# Altium PCB nrf.PcbDoc
Units mm, origin at the board's own origin, x right, y up, seen from the top; angles counter-clockwise.
Board outline 42.01 x 33.93 mm, 2 copper layers (Top Layer, Bottom Layer); 51 components, 41 nets, 214 pads, 62 vias.
Unrouted connection lines stored in the file: 1.
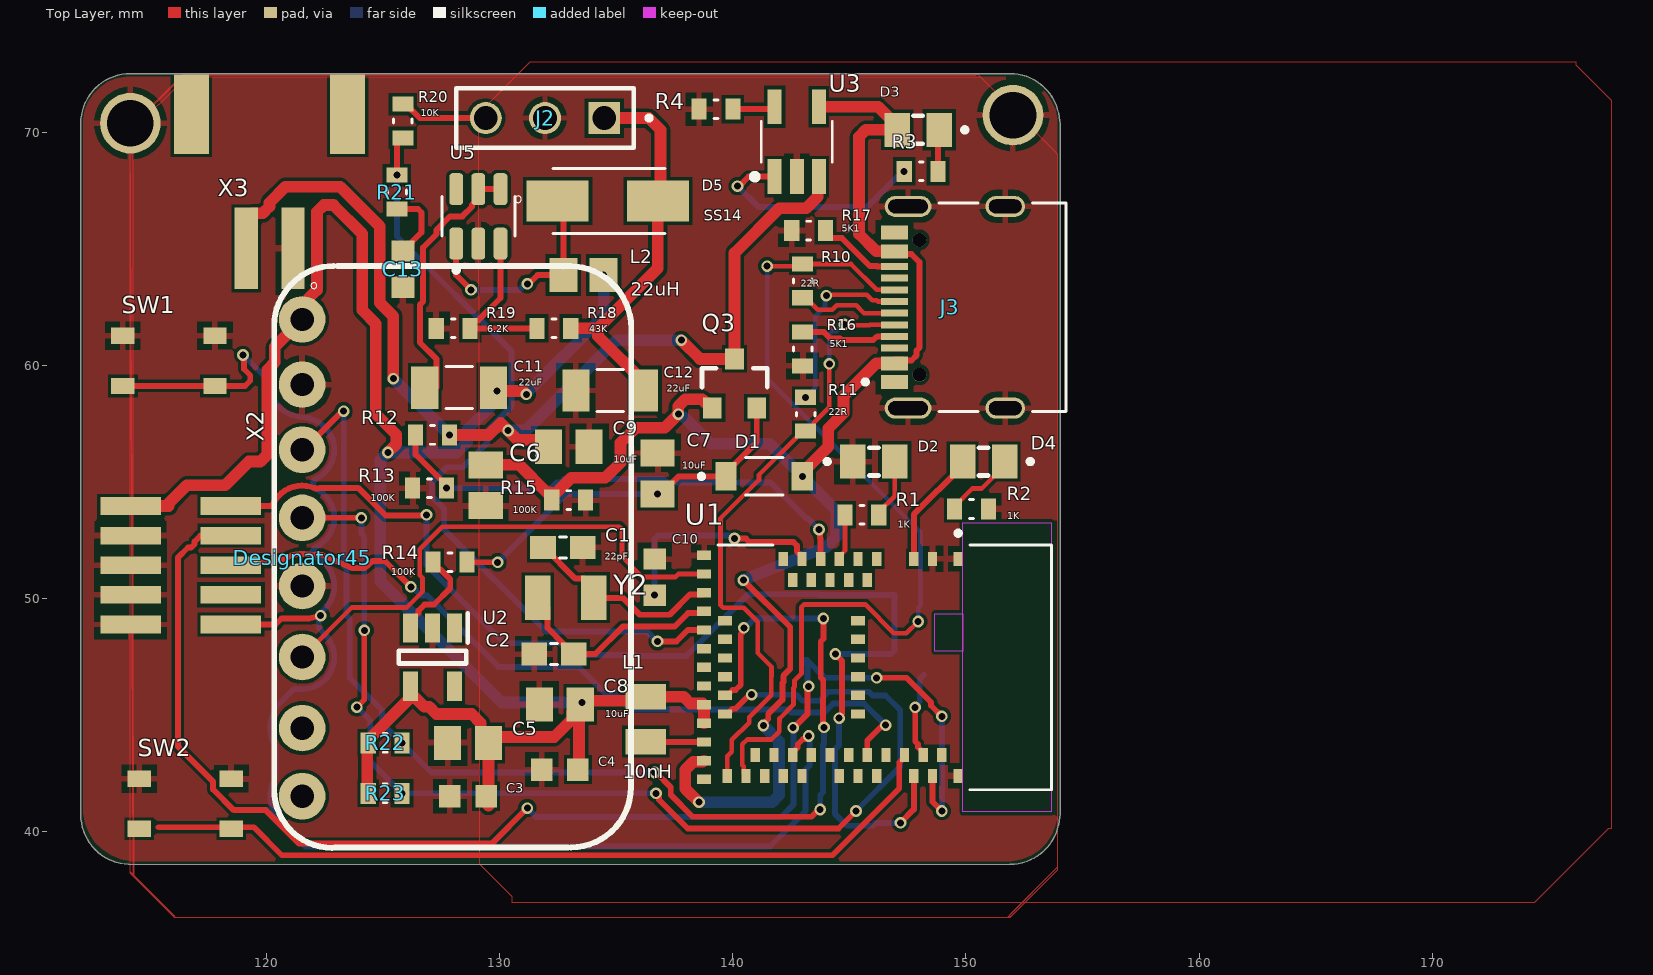
[diagram p0: Top Layer view]
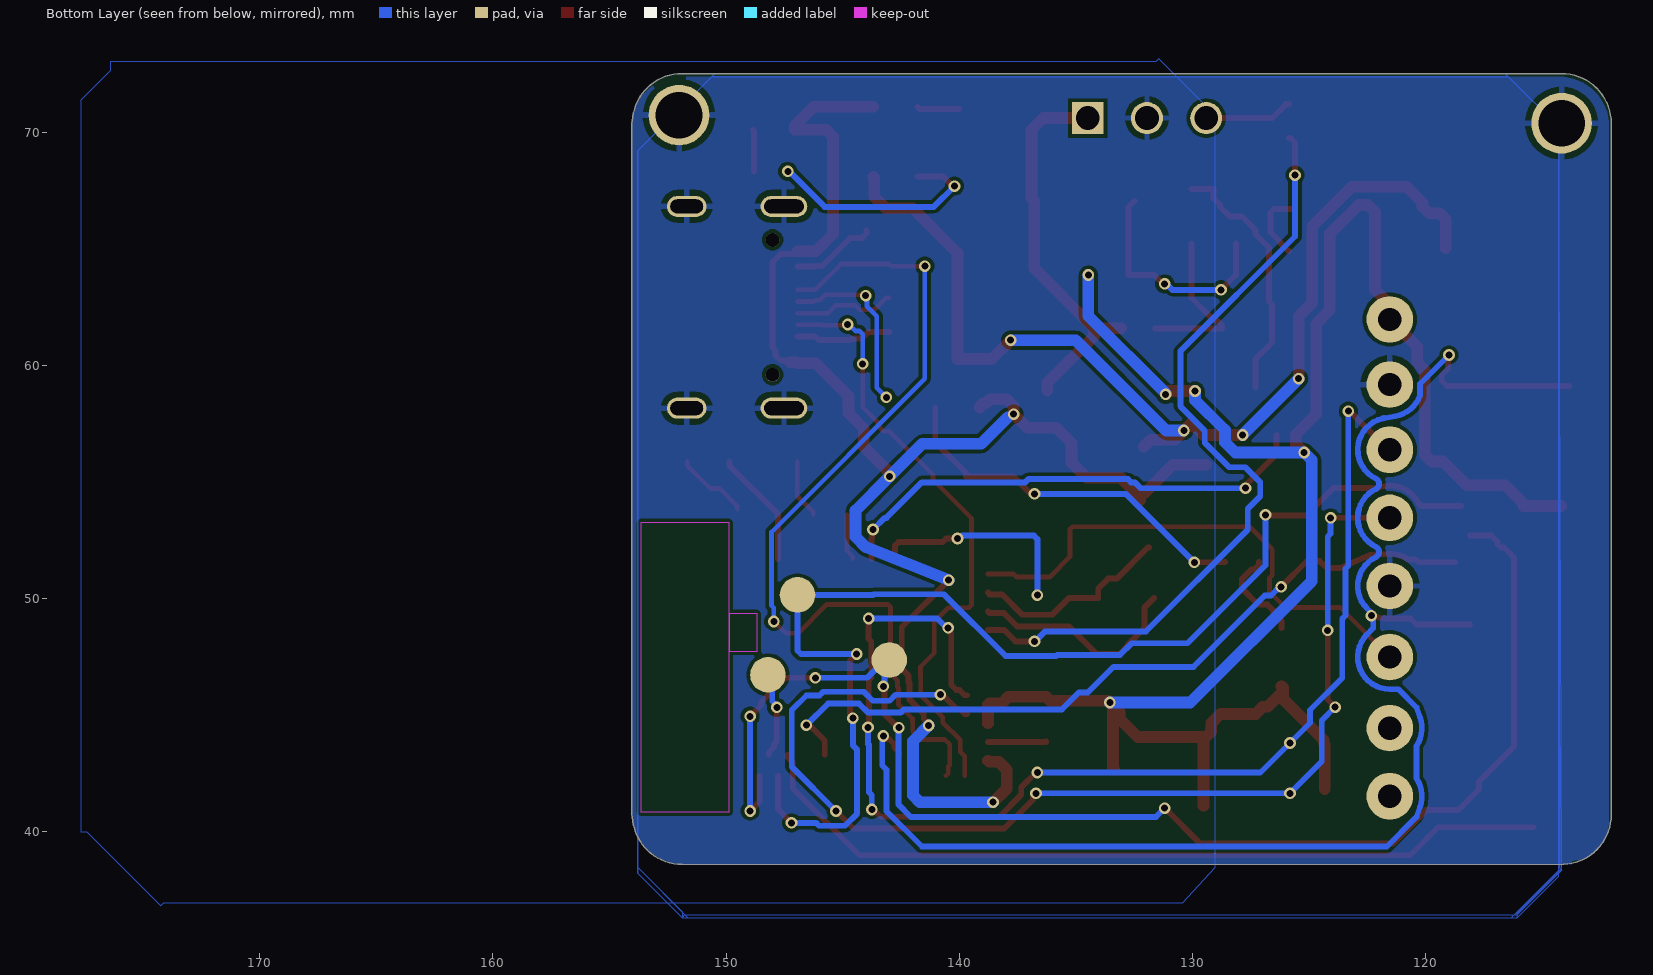
[diagram p1: Bottom Layer view, seen from below]
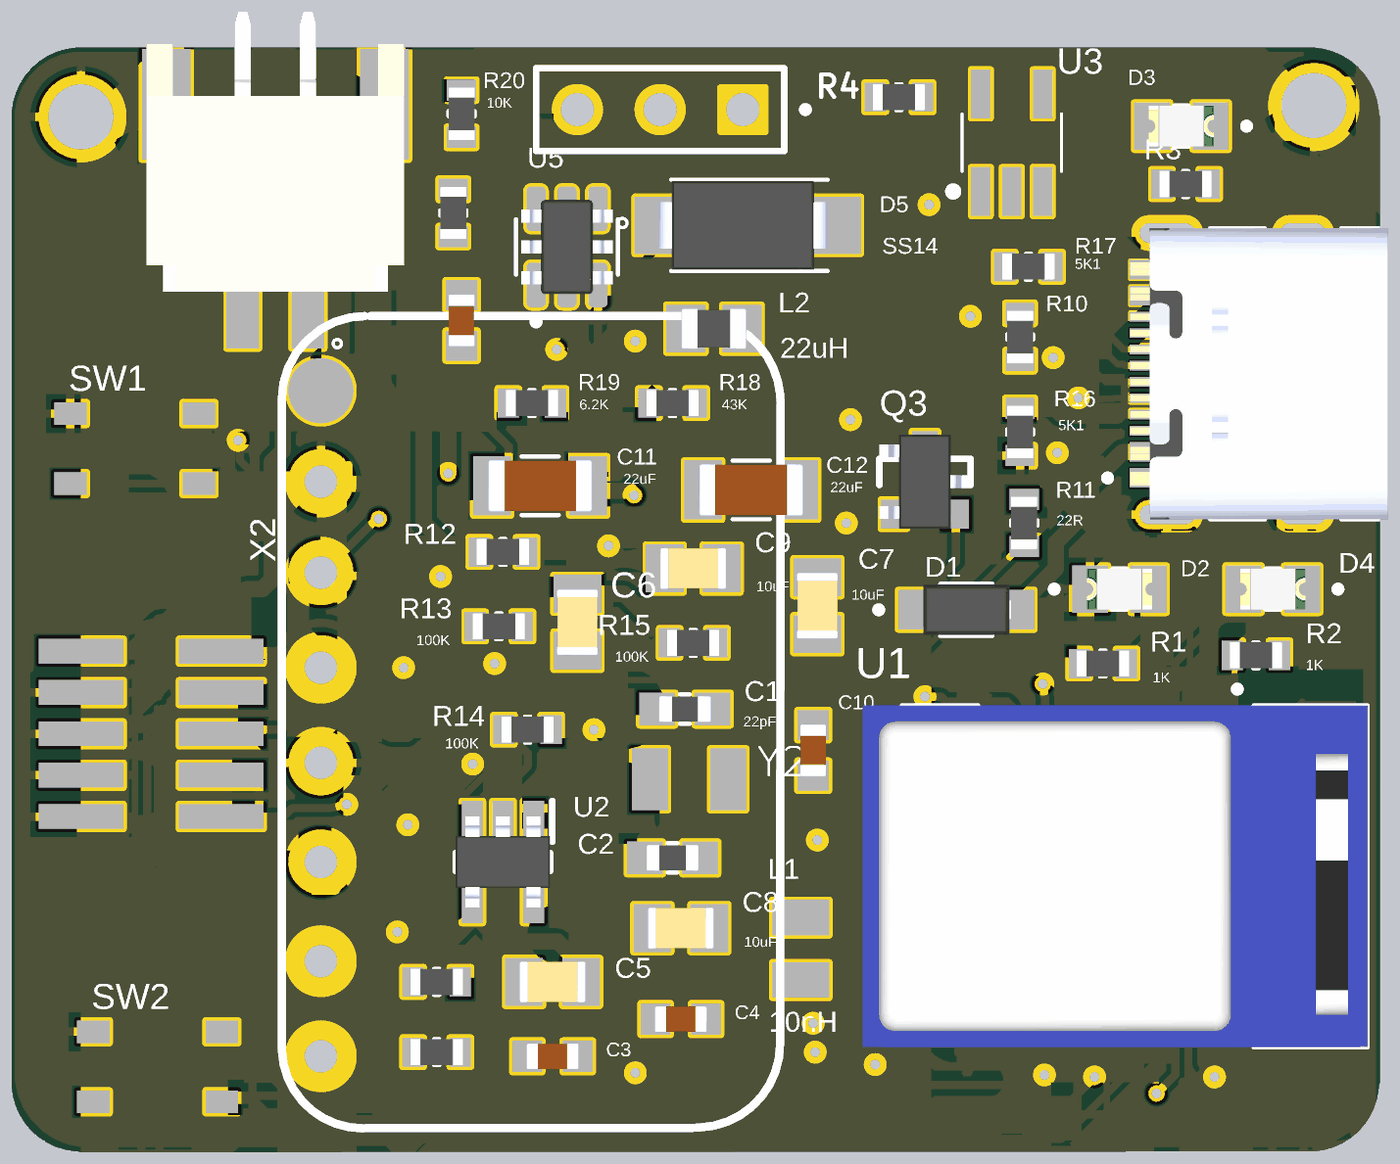
[diagram p2: 3D render of the assembled board from above, using the file's embedded part models]

## Layer stack, top to bottom
Top Solder: solder mask 0.0102, Solder Resist, Dk 3.5
Top Layer: signal copper 0.0356
Dielectric 1: dielectric 0.32, FR-4, Dk 4.8
Bottom Layer: signal copper 0.0356
Bottom Solder: solder mask 0.0102, Solder Resist, Dk 3.5

## Board outline
112.046,40.735 ccw(c114.173,40.735) 114.097,38.609 114.173,38.584 151.891,38.608 151.892,38.608 ccw(c151.892,40.735) 154.018,40.649 154.051,40.735 154.051,70.39 154.018,70.476 ccw(c151.892,70.39) 151.892,72.517 114.174,72.517 114.173,72.517 ccw(c114.173,70.39) 112.046,70.39

## Design rules (kind name [scope] priority, off if disabled: settings)
Clearance Clearance_1 [All] p1: gap=0.15 ignorepadtopadclearanceinfootprint=FALSE
PolygonConnect [All] p1: connectstyle=Relief reliefconductorwidth=0.254 reliefentries=4 polygonreliefangle="90 Angle" airgapwidth=0.254
RoutingVias [All] p1: holewidth=0.711 width=1.27 viastyle="Through Hole" minholewidth=0.711 minwidth=1.27 maxholewidth=0.711 maxwidth=1.27
SolderMaskExpansion [All] p1: expansion=0.102 istentingtop=FALSE
Width [All] p1: maxlimit=0.5 minlimit=0.2 preferedwidth=0.254 minimp=50.000000 maximp=50.000000 favimp=50.000000
30 further rules are at their usual default settings.

## Components (designator, comment, footprint, x,y, rotation, side; value= is the part's Value field where it differs from the comment)
C1 "22pF" CAPC1608X90 132.715,52.197 r0 top
C2 "22pF" CAPC1608X90 132.334,47.625 r180 top
C3 "0.1uF" CAPC1608X90N#1 128.651,41.529 r180 top
C4 "0.1uF" CAPC1608X90N#1 132.588,42.672 r180 top
C5 "10uF" CAPC2012X88N 128.651,43.815 r0 top
C6 "10uF" CAPC2012X88N 129.413,54.864 r90 top
C7 "10uF" CAPC2012X88N 136.779,55.372 r270 top
C8 "10uF" CAPC2012X88N 132.588,45.466 r0 top
C9 "10uF" CAPC2012X88N 132.969,56.515 r180 top
C10 "0.1uF" CAPC1608X90N#1 136.652,50.927 r90 top
C11 "22uF" CAPC3216X229N 128.27,59.055 r0 top
C12 "22uF" CAPC3216X229N 134.747,58.928 r0 top
C13 "100nF" CAPC1608X90N#2 125.857,64.135 r90 top
D1 "MBR0540" DIO_MBR0540-TP 141.351,55.245 r0 top
D2 "RED" LEDC2012X70N 146.05,55.88 r0 top
D3 "ORANGE" LEDC2012X70N 147.955,70.104 r180 top
D4 "BLUE" LEDC2012X70N 150.76,55.88 r180 top
D5 "SS14" SMA 134.493,67.056 r0 top
Designator45 "Comment" PCBComponent_1 132.461,50.292 r270 top
J2 "MTSW-103-13-G-S-570" SAMTEC_MTSW-103-13-G-S-570 131.953,70.612 r0 top
J3 "TYPE-C-31-M-12" HRO_TYPE-C-31-M-12 151.689,62.496 r90 top (schematic designator J?)
L1 "10nH" INDC2015X152N 136.271,44.831 r270 top
L2 "22uH" INDC2012X145N 133.604,63.881 r180 top
Q3 "AO3401" SOT23-3 140.081,59.182 r0 top
R1 "1K" RES_ERJU03J5R6V 145.542,53.594 r0 top
R2 "1K" RES_ERJU03J5R6V 150.241,53.848 r0 top
R3 "1K" RES_ERJU03J5R6V 148.082,68.326 r180 top
R4 "4K7" RES_ERJU03J5R6V 139.282,70.993 r180 top
R10 "22R" RES_ERJU03J5R6V 143.002,63.627 r270 top
R11 "22R" RES_ERJU03J5R6V 143.129,57.912 r90 top
R12 "100K" RES_ERJU03J5R6V 127.127,57.023 r180 top
R13 "100K" RES_ERJU03J5R6V 127,54.737 r0 top
R14 "100K" RES_ERJU03J5R6V 127.881,51.566 r0 top
R15 "100K" RES_ERJU03J5R6V 132.969,54.229 r0 top
R16 "5K1" RES_ERJU03J5R6V 143.002,60.706 r90 top
R17 "5K1" RES_ERJU03J5R6V 143.256,65.786 r180 top
R18 "43K" RES_ERJU03J5R6V 132.334,61.595 r0 top
R19 "6.2K" RES_ERJU03J5R6V 128.016,61.595 r0 top
R20 "10K" RES_ERJU03J5R6V 125.857,70.485 r270 top
R21 "15K" RES_ERJU03J5R6V 125.603,67.437 r90 top
R22 "4.7K" RES_ERJU03J5R6V 125.095,43.815 r0 top
R23 "4.7K" RES_ERJU03J5R6V 125.095,41.656 r0 top
SW1 "RKB2" BTN_RKB2_4.6X2.8 115.824,60.198 r0 top
SW2 "RKB2" BTN_RKB2_4.6X2.8 116.527,41.207 r0 top
U1 "MDBT50Q-1MV2" XCVR_MDBT50Q-1MV2 145.921,47.057 r270 top
U2 "RT9080-33GJ5" SOT94P280X100-5N 127.127,47.498 r270 top
U3 "MCP73831T-2ACI/OT" SOT23-5 142.748,69.596 r90 top
U5 "MT3608" SOT95P280X145-6N 129.093,66.394 r90 top
X2 "2x5 0.05\"" 2X05_1.27MM_BOX_POSTS 116.332,51.435 r270 top
X3 "S2B-PH-SM4-TB" JST_S2B-PH-SM4-TB 120.142,65.024 r0 top
Y2 "32.768 KHz" XTAL3215 132.842,50.038 r0 top

## Footprints (in the part's own frame and the unit in brackets; to place one, negate y for a bottom-side part, rotate by r counter-clockwise, add the part's x,y. Pads: shape width x height; smd on the part's side, far side on the other; paste and mask are expansions set on the pad)
2X05_1.27MM_BOX_POSTS [mm] "2X05_1.27MM_BOX_POSTS"
  rect 0.76x2.6 smd: 1(-2.54,-2.15) 2(-2.54,2.15) 3(-1.27,-2.15) 4(-1.27,2.15) 5(0,-2.15) 6(0,2.15) 7(1.27,-2.15) 9(2.54,-2.15) 10(2.54,2.15) C(1.27,2.15)
BTN_RKB2_4.6X2.8 [mm] "BTN_RKB2_4.6X2.8"
  rect 1x0.7 smd: A(1.973,1.075) A'(-1.973,1.075) B(1.973,-1.075) B'(-1.973,-1.075)
CAPC1608X90 [mm]
  rect 1.1x1 smd: 1(-0.85,0) 2(0.85,0)
  silkscreen extent -0.15,-0.45 0.15,0.45, body extent -0.8,-0.4 0.8,0.4, height 0.9
CAPC1608X90N#1 [mm]
  rect 0.92x0.97 smd: 1(-0.775,0) 2(0.775,0)
  body extent -0.8,-0.4 0.8,0.4, height 0.95
CAPC1608X90N#2 [mm]
  rect 0.92x0.98 smd: 1(-0.775,0) 2(0.775,0)
  body extent -0.8,-0.41 0.8,0.41, height 0.9
CAPC2012X88N [mm]
  rect 1.16x1.47 smd: 1(-0.875,0) 2(0.875,0)
  body extent -1.02,-0.64 1.02,0.64, height 1.4
CAPC3216X229N [mm]
  rect 1.16x1.82 smd: 1(-1.475,0) 2(1.475,0)
  silkscreen extent -0.57,-0.9 0.57,0.9, body extent -1.6,-0.8 1.6,0.8, height 2.29
DIO_MBR0540-TP [mm]
  rect 0.91x1.22 smd: A(1.635,0) C(-1.635,0)
  silkscreen extent -2.79,-0.8 0.8,0.8, body extent -1.83,-0.77 1.83,0.77, height 0.8
HRO_TYPE-C-31-M-12 [mm]
  rect 0.6x1.14 smd mask+0.05: A1_B12(-3.2,4.75) A4_B9(-2.4,4.75) B1_A12(3.2,4.75) B4_A9(2.4,4.75)
  rect 0.3x1.14 smd mask+0.05: A5(-1.25,4.75) A6(-0.25,4.75) A7(0.25,4.75) A8(1.25,4.75) B5(1.75,4.75) B6(0.75,4.75) B7(-0.75,4.75) B8(-1.75,4.75)
  oval 0.9x2 hole 0.6 slot 1.7 at 90 deg: S1(-4.325,4.17) S2(4.325,4.17)
  oval 0.9x1.7 hole 0.6 slot 1.4 at 90 deg: S3(-4.325,0) S4(4.325,0)
  round 0.6 hole 0.6 unplated: ""(-2.89,3.68) ""(2.89,3.68)
  silkscreen extent -4.47,-2.6 4.47,6.1, body extent -4.47,-2.6 4.47,5.31, height 3.31
INDC2012X145N [mm]
  rect 1.2x1.47 smd: 1(-0.86,0) 2(0.86,0)
  body extent -1,-0.63 1,0.63, height 1.45
INDC2015X152N [mm]
  rect 1.09x1.75 smd: 1(-0.959,0) 2(0.959,0)
JST_S2B-PH-SM4-TB [mm]
  rect 1x3.5 smd: 1(1,0) 2(-1,0)
  rect 1.5x3.4 smd: P1(3.35,5.75) P2(-3.35,5.75)
  silkscreen extent 1.77,-1.73 2.03,-1.47, body extent -3.95,0 3.95,8.6, height 5.5
LEDC2012X70N [mm]
  rect 1.1x1.45 smd: A(0.9,0) C(-0.9,0)
  silkscreen extent -2.1,-0.6 0.2,0.6, body extent -1,-0.63 1,0.63, height 0.7
PCBComponent_1 [mm]
  round 2 hole 1 paste-2539.97: 1(-11.684,-10.922)
  round 2 hole 1: 2(-8.89,-10.922) 3(-6.096,-10.922) 4(-3.175,-10.922) 5(-0.254,-10.922) 6(2.794,-10.922) 7(5.842,-10.922) 8(8.763,-10.922)
  silkscreen extent -13.98,-12.12 10.98,3.19
RES_ERJU03J5R6V [mm]
  rect 0.65x0.9 smd paste+0 mask+0.102: 1(-0.725,0) 2(0.725,0)
  silkscreen extent -0.08,-0.4 0.08,0.4, body extent -0.8,-0.4 0.8,0.4, height 0.45
SAMTEC_MTSW-103-13-G-S-570 [mm]
  rect 1.37x1.37 / inner round 1.37 / far side rect 1.37x1.37 hole 1.02 mask+0.102: 01(2.54,0)
  round 1.37 hole 1.02 mask+0.102: 02(0,0) 03(-2.54,0)
  silkscreen extent -3.81,-1.27 4.56,1.27
SMA [mm]
  rect 2.65x1.75 smd paste+0 mask+0.102: P1(-2,0) P2(2.3,0)
  silkscreen extent -3.84,-1.4 2.6,1.4, body extent -2.6,-1.36 2.6,1.36, height 2.5
SOT23-3 [mm]
  rect 0.8x0.9 smd: 1(-0.95,-1) 2(0.95,-1) 3(0,1.1)
  silkscreen extent -1.4,-0.1 1.4,0.7, body extent -1.4,-1.45 1.4,1.45, height 1.25
SOT23-5 [mm] "SOT23, 5-Leads, Body 3.0x3.0mm (max), Pitch 0.95mm, IPC Medium Density"
  rect 1.5x0.6 smd: 1(-1.5,0.95) 2(-1.5,0) 3(-1.5,-0.95) 4(1.5,-0.95) 5(1.5,0.95)
  silkscreen extent -1.62,-1.53 0.87,1.92, body extent -1.75,-1.52 1.75,1.53, height 1.45
SOT94P280X100-5N [mm]
  rect 1.25x0.65 smd paste+0 mask+0.102: 1(-1.25,0.94) 2(-1.25,0) 3(-1.25,-0.94) 4(1.25,-0.94) 5(1.25,0.94)
  silkscreen extent -1.88,-1.45 0.28,1.51, body extent -1.4,-1.45 1.4,1.45, height 1
SOT95P280X145-6N [mm]
  rrect50% 1.37x0.59 smd: 1(-1.17,0.95) 2(-1.17,0) 3(-1.17,-0.95) 4(1.17,-0.95) 5(1.17,0) 6(1.17,0.95)
  silkscreen extent -2.4,-1.57 0.85,1.57, body extent -1.45,-1.4 1.45,1.4, height 1.45
XCVR_MDBT50Q-1MV2 [mm]
  rect 0.6x0.4 smd: 1(-4.65,3.75) 2(-4.65,2.65) 3(-4.65,1.85) 4(-4.65,0.25) 5(-3.75,-0.15) 6(-4.65,-0.55) 7(-3.75,-0.95) 8(-4.65,-1.35) 9(-3.75,-1.75) 10(-4.65,-2.15) 11(-3.75,-2.55) 12(-4.65,-2.95) 13(-3.75,-3.35) 14(-4.65,-3.75) 34(4.65,-6.15) 35(4.65,-5.35) 36(3.75,-4.95) 37(4.65,-4.55) 38(3.75,-4.15) 39(4.65,-3.75) 40(3.75,-3.35) 41(4.65,-2.95) 42(3.75,-2.55) 43(3.75,-1.75) 44(4.65,-1.35) 45(3.75,-0.95) 46(4.65,-0.55) 47(3.75,-0.15) 48(4.65,0.25) 49(3.75,0.65) 50(3.75,1.45) 51(4.65,1.85) 52(3.75,2.25) 53(4.65,2.65) 54(3.75,3.05) 55(4.65,3.75)
  rect 0.4x0.6 smd: 15(-4.8,-7.15) 16(-4,-7.15) 17(-3.2,-7.15) 18(-2.4,-7.15) 19(-2,-6.25) 20(-1.6,-7.15) 21(-1.2,-6.25) 22(-0.8,-7.15) 23(-0.4,-6.25) 24(0,-7.15) 25(0.4,-6.25) 26(0.8,-7.15) 27(1.2,-6.25) 28(1.6,-7.15) 29(2,-6.25) 30(2.4,-7.15) 31(3.2,-7.15) 32(4,-7.15) 33(4.8,-7.15) 56(-2,-0.55) 57(-1.2,-0.55) 58(-0.4,-0.55) 59(0.4,-0.55) 60(1.2,-0.55) 61(2,-0.55)
  Keep-Out Layer region: -0.7,2.75 -2.3,2.75 -2.3,3.95 -0.7,3.95
  Keep-Out Layer region: 6.2,3.95 -6.2,3.95 -6.2,7.75 6.2,7.75
  Keep-Out Layer region: -0.7,2.75 -2.3,2.75 -2.3,3.95 -0.7,3.95
  Keep-Out Layer region: 6.2,3.95 -6.2,3.95 -6.2,7.75 6.2,7.75
  silkscreen extent -5.85,-6.55 5.25,7.75, body extent -5.25,-7.75 5.25,7.75, height 1.69
XTAL3215 [mm] "XTAL3215"
  rect 1.1x1.9 smd: P$1(1.2,0) P$2(-1.2,0)

## Part data
C1 C2: library part CC0603JPNPO9BN220, "22 pF Â±5% 50V Ceramic Capacitor C0G, NP0 0603 (1608 Metric)", Package="0603 Yageo", Check_prices=https://www.snapeda.com/parts/CC0603JPNPO9BN220/Yageo/view-part/?ref=eda, MF=Yageo, MP=CC0603JPNPO9BN220, SnapEDA_Link=https://www.snapeda.com/parts/CC0603JPNPO9BN220/Yageo/view-part/?ref=snap
C3 C4 C10: library part C0603C104K4RAC, "0.1 ÂµF Â±10% 16V Ceramic Capacitor X7R 0603 (1608 Metric)", Package="603-2 KEMET", Check_prices=https://www.snapeda.com/parts/C0603C104K4RAC/KEMET/view-part/?ref=eda, MF=KEMET, MP=C0603C104K4RAC, SnapEDA_Link=https://www.snapeda.com/parts/C0603C104K4RAC/KEMET/view-part/?ref=snap
C5 C6 C7 C8 C9: library part C0805C106K4PACTU, "10 ÂµF Â±10% 16V Ceramic Capacitor X5R 0805 (2012 Metric)", Package="0805 Kemet", Check_prices=https://www.snapeda.com/parts/C0805C106K4PACTU/KEMET/view-part/?ref=eda, MF=KEMET, MP=C0805C106K4PACTU, SnapEDA_Link=https://www.snapeda.com/parts/C0805C106K4PACTU/KEMET/view-part/?ref=snap
C11 C12: library part 12063D226MAT2A, "22 µF ±20% 25V Ceramic Capacitor X5R 1206 (3216 Metric)", Package=None, Check_prices=https://www.snapeda.com/parts/12063D226MAT2A/Kyocera/view-part/?ref=eda, MF=Kyocera, MP=12063D226MAT2A, SnapEDA_Link=https://www.snapeda.com/parts/12063D226MAT2A/Kyocera/view-part/?ref=snap
C13: library part 06035C104K4T2A, "Capacitor MLCC 0603 100nF 50V", Package="1608 AVX", Check_prices=https://www.snapeda.com/parts/06035C104K4T2A/AVX/view-part/?ref=eda, MF=AVX, MP=06035C104K4T2A, SnapEDA_Link=https://www.snapeda.com/parts/06035C104K4T2A/AVX/view-part/?ref=snap
D1: library part MBR0540-TP, "Diode Schottky 40 V 500mA Surface Mount SOD-123", Package="SOD-123 Multicomp", Check_prices=https://www.snapeda.com/parts/MBR0540-TP/Micro+Commercial+Components/view-part/?ref=eda, MF="Micro Commercial", MP=MBR0540-TP, SnapEDA_Link=https://www.snapeda.com/parts/MBR0540-TP/Micro+Commercial+Components/view-part/?ref=snap
D2 D3 D4: library part 597-3305-607F, "LED Uni-Color Green 4-Pin Chip 0805 T/R", Package=None, Availability=Unavailable, MP=597-3305-607F, Price=None
D5: "Diode Schottky 40 V 1A Surface Mount DO-214AC (SMA)", Package="SMA-2 ON Semiconductor", Check_prices=https://www.snapeda.com/parts/SS14/Onsemi/view-part/?ref=eda, MF=ON, MP=SS14, SnapEDA_Link=https://www.snapeda.com/parts/SS14/Onsemi/view-part/?ref=snap
J2: "Connector Header Through Hole 3 position 0.100 (2.54mm)", Package=None, Check_prices=https://www.snapeda.com/parts/MTSW-103-13-G-S-570/Samtec/view-part/?ref=eda, MF=Samtec, MP=MTSW-103-13-G-S-570, SnapEDA_Link=https://www.snapeda.com/parts/MTSW-103-13-G-S-570/Samtec/view-part/?ref=snap
J3: "USB Connectors 24 Receptacle 1 8.94*7.3mm RoHS", Package=Package, Check_prices=https://www.snapeda.com/parts/TYPE-C-31-M-12/HRO+Electronics+Co.%252C+Ltd./view-part/?ref=eda, MF="HRO Electronics Co., Ltd.", MP=TYPE-C-31-M-12, SnapEDA_Link=https://www.snapeda.com/parts/TYPE-C-31-M-12/HRO+Electronics+Co.%252C+Ltd./view-part/?ref=snap
L1: library part LQW2BAS10NG00L, "FIXED IND 10NH 600MA 100 MOHM", Package=None, Availability=Unavailable, MP=LQW2BAS10NG00L, Price=None
L2: library part LQM21DH220M70L, "Inductor with Inductance: 22uH Tol. +/-20%, Package: 0805 (2012)", Package="2012 Bourns", Check_prices=https://www.snapeda.com/parts/LQM21DH220M70L/Murata/view-part/?ref=eda, MF=Murata, MP=LQM21DH220M70L, SnapEDA_Link=https://www.snapeda.com/parts/LQM21DH220M70L/Murata/view-part/?ref=snap
Q3: "P-Channel 30 V 4A (Ta) 1.4W (Ta) Surface Mount SOT-23-3", Package="SOT-23-3 Alpha &amp; Omega Semiconductor", Check_prices=https://www.snapeda.com/parts/AO3401/Alpha/view-part/?ref=eda, MF="Alpha & Omega Semiconductor", MP=AO3401, SnapEDA_Link=https://www.snapeda.com/parts/AO3401/Alpha/view-part/?ref=snap
R1 R2 R3 R4 R10 R11 R12 R13 R14 R15 R16 R17 R18 R19 R20 R21 R22 R23: library part ERJU03J5R6V, "0201 anti-sulfurated resistor 0603 Anti-Sulfurated", Package="1608-2 Panasonic", Check_prices=https://www.snapeda.com/parts/ERJ-U03J5R6V/Panasonic/view-part/?ref=eda, MF=Panasonic, MP=ERJ-U03J5R6V, SnapEDA_Link=https://www.snapeda.com/parts/ERJ-U03J5R6V/Panasonic/view-part/?ref=snap
SW1 SW2: library part SWITCH_TACT_SMT_RKB2, "SMT Tact Switches RKB2 https://www.digikey.com/short/m027prz5", DeviceName=_RKB2, DeviceSetName=SWITCH_TACT_SMT, GateName_1=G$1, LibraryName=adafruit_electromech, SymbolName_1=BUTTON_4PIN
U1: "802.15.4, Bluetooth Bluetooth v5.4, ZigbeeÂ® Transceiver Module 2.36GHz ~ 2.5GHz Integrated, Chip Surface Mount", Package="SMD-61 Raytac Corporation", Check_prices=https://www.snapeda.com/parts/MDBT50Q-1MV2/Raytac+Corporation/view-part/?ref=eda, MF="Raytac Corporation", MP=MDBT50Q-1MV2, SnapEDA_Link=https://www.snapeda.com/parts/MDBT50Q-1MV2/Raytac+Corporation/view-part/?ref=snap
U2: "Linear Voltage Regulator IC Positive Fixed 1 Output 600mA TSOT-23-5", Package="TSOT-23 Richtek", Check_prices=https://www.snapeda.com/parts/RT9080-33GJ5/Richtek/view-part/?ref=eda, MF="Richtek USA", MP=RT9080-33GJ5, SnapEDA_Link=https://www.snapeda.com/parts/RT9080-33GJ5/Richtek/view-part/?ref=snap
U3: library part MCP73831/2, "MCP73831/2 LIPO Charger    VDD: 3.75 - 6V  Temp -40 - 85Â°C  Programmable Charge Rate: 15-500mA       NOTE: STAT is a tri-state logic output on the MCP73831 and an open-drain output on the MCP73832.   SOT23-5 with 4.2V output and tri-state logic on STAT = MCP73831T-2ACI/OT", JLC_ROTATION=0, LCSC=C424093, Temp=Temp:, 3.75-6V=3.75-6V, -40-85Â°C=-40-85Â°C, DeviceSetName=MCP73831/2, GateName_1=G$1, LibraryName=microbuilder, LIPOCharger="LIPO Charger", MCP73831/2=MCP73831/2, SymbolName_1=MCP73831/2, VDD=VDD:
U5: "High Efficiency 1.2MHz2A Step Up Converter", Package=Package, Availability="Not in stock", Check_prices=https://www.snapeda.com/parts/MT3608/Aerosemi+Technology+Co.%252C+Ltd/view-part/?ref=eda, MF="Aerosemi Technology Co., Ltd", MP=MT3608, Price=None, SnapEDA_Link=https://www.snapeda.com/parts/MT3608/Aerosemi+Technology+Co.%252C+Ltd/view-part/?ref=snap
X2: library part JTAG-CORTEXBOXPOSTS, "Serial Wire (SW-DP) Connector   Standard 0.05\" 10-pin connector is for use with the Cortex M and Cortex A SWD (serial wire debugger) interface (SW-DP)Connectors 2x05_1.27MM_SMT - Inexpensive surface-mount header with bare pins, compatible with standard 10-pin SWD cables (4UCON: 16846)  2x05_1.27MM_BOX_NOPOSTS - Polarised surface-mount box (4UCON with caps: 19735, without caps: 15117  2x05_1.27MM_BOX_POSTS - Polarised surface-mount box with mounting holes (4UCON: 20317)    Pinout: http://infocenter.arm.com/help/topic/com.arm.doc.faqs/attached/13634/cortex_debug_connectors.pdf  http://www.keil.com/peripherals/coresight/connectors.asp", DeviceName=BOXPOSTS, DeviceSetName=JTAG-CORTEX, GateName_1=G$1, GND=GND, GNDDetect=GNDDetect, KEY=KEY, LibraryName=adafruit_electromech, NC/TDI=NC/TDI, nRESET=nRESET, SWDCLK/TCK=SWDCLK/TCK, SWDIO/TMS=SWDIO/TMS, SWO/TDO=SWO/TDO, SymbolName_1=JTAG-CORTEX, VCC=VCC
X3: "Connector Header Surface Mount, Right Angle 2 position 0.079 (2.00mm)", Package=None, Check_prices=https://www.snapeda.com/parts/S2B-PH-SM4-TB/JST/view-part/?ref=eda, MF="JST Sales", MP=S2B-PH-SM4-TB, SnapEDA_Link=https://www.snapeda.com/parts/S2B-PH-SM4-TB/JST/view-part/?ref=snap
Y2: library part XTAL-3.2X1.5, "Low cost SMT crystals, no capacitors included    http://www.ladyada.net/library/eagle", DeviceName=-3.2X1.5, DeviceSetName=XTAL, GateName_1=G$1, LibraryName=adafruit2, SymbolName_1=XTAL

## Free pads (board coordinates)
  round 2.6 hole 2: 2(114.173,70.39) 2(152.019,70.739)
  round 1.524 smd far side: "TP NCF1"(148.209,46.736) "TP SWCLK"(143.002,47.371) "TP SWDIO"(146.939,50.165)

## Via types
v1: diameter 0.5, hole 0.3, Top Layer to Bottom Layer, 62 vias

## Nets (pads, with @x,y where several pads share a name; then routed paths per layer and width w, separated by ;. In a path a pad name is that pad's centre, name@x,y a point inside that pad or via, vN(x,y) a via of type N, cw(c..) or ccw(c..) an arc to the next point about the centre after c; other vN are vias at no path point)
3.3V: C3.1 C4.1 C5.2 C8.2 C11.2 Designator45.1 L1.1 L2.1 R22.1 R23.1 U1.28 U1.30 U2.4 X2.1 | length 87.6
  Top Layer w0.5: X2.1 115.824,53.975 115.824,54.091 116.592,54.859 118.232,54.859 119.253,55.88 119.742,55.88 120.035,56.173 120.035,59.805 120.367,60.137 120.367,60.804 121.826,62.263 121.826,62.892 122.174,63.24 122.174,66.587 122.467,66.88 122.881,66.88 124.109,65.652 124.109,64.341 124.109,62.379 124.694,61.794 124.694,57.921 125.573,57.042 125.573,56.628 v1(125.214,56.269) ; R23.1@124.333,41.838 R22.1@124.333,43.731 ; R22.1 124.37,43.94 126.112,45.682 126.112,46.173 U2.4 ; U2.4@126.187,45.948 126.769,45.366 126.982,45.366 127.295,45.054 128.809,45.054 129.196,44.667 129.196,44.3 129.427,44.069 C5.2@129.526,44.069 ; C3.1@129.526,41.12 C5.2 C5.2@129.526,44.069 ; v1(129.891,58.909) 131.007,58.909 v1(131.153,58.763) ; C4.1 133.413,42.722 C8.2@133.413,45.416 ; U1.30 U1.28 138.721,45.507 138.179,45.507 137.896,45.79 L1.1 136.109,45.628 133.625,45.628 v1(133.544,45.547) C8.2 C8.2@133.413,45.416 ; C5.2@129.526,44.069 132.344,44.069 133.133,44.858 133.133,45.136 C8.2@133.413,45.416
  Bottom Layer w0.5: v1(129.891,58.909) 129.891,58.517 128.606,57.232 128.606,56.711 128.164,56.269 v1(125.214,56.269) 124.892,55.948 124.892,50.746 130.091,45.547 v1(133.544,45.547) ; v1(131.153,58.763) 131.153,58.813 134.464,62.124 v1(134.464,63.881)
5V: C12.2 D5.P2 J2.01 R18.2 | length 16.9
  Top Layer w0.5: R18.2 134.226,61.595 ; J2.01 136.398,70.612 136.906,70.104 136.906,67.169 D5.P2 136.793,64.162 134.226,61.595 ; C12.2 136.222,59.258 134.226,61.254 134.226,61.595
AREF: C10.1 U1.12 | length 9.4
  Top Layer w0.254: v1(140.081,52.578) 140.567,52.578 140.716,52.429 142.603,52.429 142.752,52.28 142.752,52.026 142.898,51.88 142.898,51.78 U1.12
  Bottom Layer w0.254: v1(136.652,50.152) 136.652,52.556 136.801,52.705 139.887,52.705 140.014,52.578 v1(140.081,52.578)
D10: Designator45.6 U1.16 | length 22.4
  Top Layer w0.2: Designator45.6 123.664,49.623 126.022,49.623 126.698,50.299 126.698,50.896 126.581,51.013 126.581,52.12 127.547,53.086 135.138,53.086 135.255,52.969 135.255,51.8 136.128,50.927 137.541,50.927 137.671,51.057 U1.16
GND: C1.2 C2.2 C3.2 C4.2 C5.1 C6.1 C7.1 C8.1 C9.1 C10.2 C12.1 C13.1 D2.C Designator45.2 Designator45.5 J2.02 J3.A1_B12 J3.B1_A12 J3.S1 J3.S2 J3.S3 J3.S4 pad.2 R2.2 R4.2 R13.1 R15.2 R16.1 R17.2 R19.1 SW1.A SW1.A' SW2.A SW2.A' U1.1 U1.2 U1.15 U1.33 U1.55 U2.2 U3.2 U5.2 X2.3 X2.5 X2.7 X2.9 X3.1
"Led 1": R1.1 U1.8 | length 2
  Top Layer w0.2: U1.8 144.571,51.807 144.817,52.053 R1.1
"Led 2": D4.A U1.3 | length 5
  Top Layer w0.254: U1.3 147.771,53.616 149.86,55.705 D4.A
NetC1_1: C1.1 U1.17 Y2.P$1 | length 8.7
  Top Layer w0.254: C1.1 131.915,52.197 133.251,50.861 133.619,50.861 134.042,50.438 Y2.P$1 135.282,50.038 136.009,49.311 137.295,49.311 138.168,50.184 138.698,50.184 U1.17
NetC2_1: C2.1 U1.18 Y2.P$2 | length 9.4
  Top Layer w0.254: Y2.P$2 132.065,49.615 132.065,48.744 132.761,48.048 132.761,47.998 133.134,47.625 134.112,47.625 135.29,48.803 137.505,48.803 138.09,49.388 138.702,49.388 U1.18
NetC7_2: C7.2 D1.C Q3.2 R14.2 | length 16.1
  Top Layer w0.254: R14.2 128.61,51.562 v1(129.921,51.562) ; v1(136.779,54.497) 136.934,54.497 137.682,55.245 D1.C 139.716,55.4 141.031,56.715 Q3.2
  Bottom Layer w0.254: v1(129.921,51.562) 132.856,54.497 v1(136.779,54.497)
NetC11_1: C11.1 U5.4 U5.5 | length 11.1
  Top Layer w0.254: C11.1@127.303,59.055 127.303,60.269 126.585,60.987 126.585,62.599 126.728,62.742 126.728,65.063 127.304,65.639 127.304,65.818 127.881,66.394 128.405,66.394 128.819,66.808 128.819,66.889 129.093,67.163 U5.5 U5.4
NetC13_2: C13.2 R21.1 | length 3.1
  Top Layer w0.254: R21.1 126.507,66.712 126.656,66.563 126.656,65.709 126.22,65.273 126.22,65.243 125.887,64.91 C13.2
NetD2_A: D2.A R1.2 | length 2.6
  Top Layer w0.2: R1.2 146.267,53.719 146.95,54.402 D2.A
NetD3_C: D3.C R3.1 | length 1.8
  Top Layer w0.254: R3.1 148.807,70.056 D3.C
NetD4_C: D4.C R2.1 | length 3.2
  Top Layer w0.2: R2.1 149.516,53.973 150.269,54.726 150.681,54.726 151.66,55.705 D4.C
NetD5_P1: D5.P1 L2.2 U5.1 | length 9.7
  Top Layer w0.254: U5.1 128.143,63.881 v1(128.778,63.246) ; v1(131.191,63.5) 131.258,63.5 131.639,63.881 L2.2 132.744,66.805 D5.P1
  Bottom Layer w0.254: v1(128.778,63.246) 130.87,63.246 131.124,63.5 v1(131.191,63.5)
NetJ2_03: J2.03 R20.1 | length 3.8
  Top Layer w0.254: R20.1 125.982,71.21 126.58,70.612 J2.03
NetJ?_A5: J3.A5 R16.2 | length 4.1
  Top Layer w0.254: R16.2 143.914,61.431 144.189,61.156 144.594,61.156 144.659,61.091 146.025,61.091 146.168,61.234 146.193,61.234 146.205,61.246 J3.A5
NetJ?_A6: J3.A6 R10.2 | length 4.4
  Top Layer w0.2: R10.2 143.127,62.902 143.641,62.388 144.268,62.388 144.46,62.58 145.298,62.58 145.632,62.246 J3.A6
NetJ?_A7: J3.A7 R11.2 | length 7.8
  Top Layer w0.2: v1(144.018,62.992) 144.06,63.034 145.747,63.034 145.989,62.792 146.172,62.792 146.218,62.746 J3.A7
  Bottom Layer w0.2: v1(143.129,58.637) 143.541,59.049 143.541,62.119 143.961,62.539 143.961,62.935 v1(144.018,62.992)
NetJ?_B5: J3.B5 R17.1 | length 3.7
  Top Layer w0.254: R17.1 143.981,65.661 144.179,65.463 144.687,65.463 145.888,64.262 146.177,64.262 146.193,64.246 J3.B5
NetL1_1: 
NetL1_2: L1.2 U1.31 | length 2.5
  Top Layer w0.254: L1.2 136.286,43.857 U1.31
NetR3_2: R3.2 U3.1 | length 9.9
  Top Layer w0.254: v1(140.208,67.691) 140.275,67.691 140.68,68.096 U3.1
  Bottom Layer w0.254: v1(140.208,67.691) 141.097,66.802 145.775,66.802 147.299,68.326 v1(147.357,68.326)
NetR4_1: R4.1 U3.5 | length 1.8
  Top Layer w0.254: R4.1 141.695,70.993 U3.5
NetR14_1: R14.1 U2.3 | length 4.1
  Top Layer w0.254: U2.3 126.187,49.048 126.525,49.386 126.525,49.488 126.791,49.754 127.193,49.754 127.889,50.45 127.889,50.833 127.479,51.243 127.354,51.243 127.156,51.441 R14.1
NetR18_1: R18.1 R19.2 U5.3 | length 7.1
  Top Layer w0.254: U5.3 130.043,62.897 129.064,61.918 128.939,61.918 128.741,61.72 R19.2 R18.1
NFC1: "pad.TP NCF1" U1.52 | length 3.7
  Top Layer w0.245: v1(147.828,45.339) 147.828,43.882 147.948,43.763 147.948,43.628 148.091,43.484 148.094,43.484 148.171,43.407 U1.52
  Bottom Layer w0.245: v1(147.828,45.339) 147.828,45.408 148.026,45.607 148.026,46.553 148.209,46.736
P0.04: R20.2 R21.2 U1.20 | length 34.3
  Top Layer w0.254: v1(125.603,68.162) 125.603,69.562 125.801,69.76 R20.2 ; v1(136.779,48.172) 137.593,48.172 138.078,48.657 U1.20
  Bottom Layer w0.254: v1(125.603,68.162) 125.603,65.529 130.522,60.609 130.522,58.256 129.474,57.208 129.474,56.686 128.426,55.638 127.734,55.638 127.094,54.998 127.094,54.392 127.631,53.855 127.631,52.96 131.992,48.599 136.314,48.599 136.74,48.172 v1(136.779,48.172)
RESET: SW1.B SW1.B' U1.40 X2.10 | length 64.9
  Top Layer w0.245: SW1.B' SW1.B 119.09,59.123 119.318,59.351 119.318,59.574 119.048,59.844 119.048,60.403 v1(118.999,60.452) ; X2.10@118.101,48.895 120.396,48.895 120.653,49.152 121.815,49.152 v1(122.334,49.269) ; U1.40 142.571,43.407 142.794,43.63 142.794,43.763 143.015,43.984 143.092,43.984 143.219,44.111 v1(143.259,44.111)
  Bottom Layer w0.245: v1(118.999,60.452) 120.245,59.206 120.245,58.712 ccw(c121.539,59.182) 121.304,57.826 121.771,57.745 cw(c121.539,56.388) 121.775,57.744 cw(c121.539,56.388) 121.868,57.725 cw(c121.539,56.388) 122.136,55.148 ccw(c122.243,54.927) 122.136,54.707 cw(c121.539,53.467) 122.136,52.227 ccw(c122.243,52.006) 122.136,51.786 cw(c121.539,50.546) 122.752,49.896 cw(c121.539,50.546) 122.513,49.573 122.334,49.394 v1(122.334,49.269) ; v1@122.322,49.258 122.25,49.186 122.25,49.085 122.25,48.737 122.518,48.465 cw(c121.539,47.498) 121.539,46.121 121.178,46.121 120.396,45.339 120.244,44.917 ccw(c121.539,44.45) 120.396,43.683 120.396,42.296 ccw(c121.539,41.529) 120.244,41.063 120.396,40.64 120.468,40.568 121.666,39.37 141.605,39.37 143.122,40.887 143.122,42.667 143.303,42.848 143.303,44.067 v1(143.259,44.111) ; v1@122.322,49.258 v1(122.334,49.269)
SCL: Designator45.3 R22.2 U1.27 | length 52.6
  Top Layer w0.245: Designator45.3 121.602,56.388 123.253,58.039 v1(123.317,58.039) ; v1(136.652,42.545) 136.711,42.545 137.341,41.916 137.341,41.589 138.281,40.648 143.374,40.648 143.682,40.957 v1(143.751,40.957) ; U1.27 139.771,45.857 139.848,45.934 139.848,45.937 139.992,46.08 140.127,46.08 140.348,46.301 140.348,47.013 140.347,48.481 140.429,48.563 140.429,48.704 v1(140.478,48.752) ; v1(143.891,49.149) 143.891,48.282 143.772,48.163 143.772,46.614 143.883,46.504 143.883,45.711 143.87,45.698 143.87,44.528 v1(143.915,44.483)
  Bottom Layer w0.245: v1(123.317,58.039) 123.325,58.031 123.325,51.412 123.444,51.293 123.444,49.276 123.579,49.141 123.579,46.601 124.959,45.221 124.959,44.676 v1(125.82,43.815) 127.09,42.545 v1(136.652,42.545) ; v1(140.478,48.752) 140.547,48.752 140.943,49.149 v1(143.891,49.149) ; v1(143.751,40.957) 143.751,41.574 143.874,41.697 143.874,43.731 143.915,43.772 v1(143.915,44.483)
SDA: Designator45.4 R23.2 U1.29 | length 49.4
  Top Layer w0.245: Designator45.4 v1(124.079,53.467) ; v1(123.885,45.35) 124.206,45.671 v1(124.206,48.641) ; v1(136.714,41.656) 136.714,41.587 136.841,41.459 136.841,41.382 138.074,40.149 144.543,40.149 v1(145.288,40.894) ; U1.29 139.771,45.057 139.995,45.28 140.127,45.28 140.683,45.836 140.767,45.836 v1(140.816,45.885)
  Bottom Layer w0.245: v1(123.885,45.35) 124.46,44.776 124.46,43.016 v1(125.82,41.656) v1(136.714,41.656) ; v1(124.079,53.467) 124.079,52.786 124.198,52.667 124.198,48.649 v1(124.206,48.641) ; v1(140.816,45.885) 142.73,45.885 142.997,45.618 143.703,45.618 144.097,46.012 145.835,46.012 146,45.847 146.558,45.847 147.185,45.22 147.185,42.791 v1(145.288,40.894)
SWCLK: "pad.TP SWCLK" U1.53 X2.4 | length 59.2
  Top Layer w0.254: X2.4@118.101,52.705 117.181,52.705 116.928,52.452 116.928,52.345 116.779,52.196 116.643,52.196 116.205,51.758 116.205,43.671 117.723,42.153 117.723,41.817 118.609,40.931 119.979,40.931 121.413,39.497 129.667,39.497 v1(131.191,41.021) ; v1(142.596,44.47) 142.619,44.47 143.214,45.065 143.214,46.202 v1(143.256,46.244) ; v1(146.177,46.609) 147.45,46.609 148.507,45.553 148.507,45.422 v1(148.971,44.958) ; U1.53 148.571,41.294 v1(148.971,40.894)
  Bottom Layer w0.254: v1(131.191,41.021) 131.572,40.64 142.077,40.64 142.616,41.179 142.616,44.45 v1(142.596,44.47) ; v1(143.256,46.244) 143.209,46.291 143.209,47.092 143.245,47.128 143.002,47.371 143.189,47.371 143.951,46.609 v1(146.177,46.609) ; v1(148.971,40.894) v1(148.971,44.958)
SWDIO: "pad.TP SWDIO" U1.51 X2.2 | length 51.6
  Top Layer w0.254: X2.2 120.198,53.975 120.272,54.049 120.3,54.078 cw(c121.539,53.467) 122.079,54.738 ccw(c122.177,54.972) 122.27,54.736 cw(c122.363,54.5) 122.396,54.752 122.398,54.751 123.941,54.751 125.123,53.569 126.848,53.569 v1(126.873,53.594) ; v1(144.399,47.625) 144.69,47.334 144.69,45.067 144.567,44.944 v1(144.567,44.878) ; v1(147.193,40.386) 147.771,40.964 U1.51
  Bottom Layer w0.254: v1(126.873,53.594) 126.873,51.435 130.217,48.091 132.611,48.091 133.117,47.585 135.801,47.585 135.845,47.541 138.015,47.541 140.663,50.189 143.675,50.189 143.699,50.165 146.939,50.165 146.939,47.774 146.79,47.625 v1(144.399,47.625) ; v1(144.567,44.878) 144.567,43.712 144.382,43.527 144.382,40.784 144.903,40.263 146.015,40.263 146.138,40.386 v1(147.193,40.386)
SWITCH: SW2.B SW2.B' U1.50 | length 35
  Top Layer w0.245: 115.378,40.2 119.471,40.2 120.678,38.993 144.274,38.993 147.148,41.867 147.148,42.984 147.371,43.207 U1.50
SWO: U1.47 X2.6 | length 33.1
  Top Layer w0.254: X2.6@118.745,51.562 120.312,51.562 120.439,51.689 120.764,51.689 cw(c121.539,50.546) 121.639,51.923 122.151,51.886 ccw(c122.17,52.14) 122.17,51.886 122.38,51.886 123.691,51.312 124.213,51.312 124.556,51.615 125.09,51.615 v1(126.198,50.506) ; U1.47 145.771,43.917 146.384,44.53 146.511,44.53 v1(146.558,44.577)
  Bottom Layer w0.254: v1(126.198,50.506) 126.265,50.506 126.634,50.137 126.901,50.137 129.961,47.077 133.39,47.077 134.493,45.974 134.874,45.974 135.594,45.254 142.375,45.254 142.515,45.114 143.911,45.114 144.306,45.509 145.626,45.509 v1(146.558,44.577)
USB-DM: J3.B7 R11.1 U1.34 | length 26.2
  Top Layer w0.2: U1.34 139.771,43.251 139.963,43.443 139.963,43.942 140.71,44.689 140.71,44.925 141.648,45.863 141.648,46.667 141.665,46.684 141.665,47.088 141.082,47.671 141.082,49.003 140.473,49.611 139.594,49.611 139.477,49.728 139.477,53.44 141.128,55.091 141.128,55.311 143.004,57.187 R11.1 143.254,57.187 143.479,57.412 143.479,57.537 144.145,58.203 v1(144.145,60.071) ; v1(144.791,61.756) 144.825,61.722 145.545,61.722 145.55,61.727 145.864,61.727 145.883,61.746 J3.B7
  Bottom Layer w0.2: v1(144.145,60.071) 144.145,61.341 144.286,61.482 144.459,61.482 144.732,61.756 v1(144.791,61.756)
USB-DP: J3.B6 R10.1 U1.35 | length 38.7
  Top Layer w0.2: U1.35 140.471,42.507 140.471,42.806 140.417,42.86 140.417,43.255 140.417,43.754 140.624,43.961 141.65,43.961 141.992,44.303 141.992,44.72 142.007,44.735 142.007,44.861 142.61,45.464 142.61,46.178 142.652,46.221 142.652,46.495 142.948,46.79 142.948,49.636 143.065,49.753 145.676,49.753 146.915,48.514 147.447,48.514 v1(147.955,49.022) ; v1(141.478,64.262) 142.912,64.262 R10.1 145.071,64.352 146.177,63.246 J3.B6
  Bottom Layer w0.2: v1(141.478,64.262) 141.478,59.434 148.055,52.857 148.055,49.703 147.955,49.603 v1(147.955,49.022)
VBAT: C9.2 Q3.3 R12.1 U3.3 X3.2 | length 45
  Top Layer w0.5: X3.2 119.142,66.274 119.392,66.524 119.845,66.524 120.138,66.817 120.138,66.983 120.817,67.662 123.165,67.662 124.863,65.964 124.863,64.029 124.863,62.691 125.448,62.106 v1(125.448,59.436) ; v1(127.852,57.023) 129.54,57.023 130.048,57.531 130.764,56.815 131.794,56.815 C9.2 ; v1(137.795,61.087) 138.6,60.282 Q3.3 140.081,64.824 141.997,66.74 143.155,66.74 143.648,67.233 143.648,68.046 U3.3
  Bottom Layer w0.5: v1(125.448,59.436) 125.448,59.427 v1(127.852,57.023) ; v1(130.369,57.21) 131.124,57.21 135.001,61.087 v1(137.795,61.087)
VBUS: C6.2 D1.A D3.A J3.A4_B9 J3.B4_A9 Q3.1 R15.1 U1.32 U3.4 | length 69.2
  Top Layer w0.254: v1(140.458,50.796) 142.467,48.787 142.467,46.989 142.171,46.694 142.171,46.42 142.129,46.377 142.129,45.663 141.526,45.06 141.526,44.843 141.314,44.632 v1(141.314,44.565) ; J3.A4_B9 147.058,60.215 147.667,60.215 147.89,60.438 147.89,60.641 148.013,60.764 148.013,64.431 147.667,64.777 147.058,64.777 J3.B4_A9
  Top Layer w0.5: C6.2 130.842,55.739 132.025,54.556 132.169,54.556 132.244,54.481 R15.1@132.244,54.356 ; R15.1 132.244,54.354 133.073,55.183 134.54,55.183 135.188,55.831 135.188,56.683 135.835,57.331 137.087,57.331 v1(137.668,57.912) 137.668,58.254 137.961,58.547 138.688,58.547 138.853,58.382 138.981,58.382 139.131,58.232 Q3.1 ; v1(138.557,41.275) 138.279,41.553 138.262,41.553 137.967,41.848 137.967,42.666 138.308,43.007 138.721,43.007 U1.32 ; v1(142.986,55.245) 142.986,55.4 144.096,56.51 144.096,57.3 144.749,57.953 144.749,58.689 146.156,60.096 J3.A4_B9 146.989,60.146 J3.A4_B9@147.272,60.146 ; U3.4 146.238,71.096 147.055,70.279 D3.A 145.708,70.104 145.415,69.811 145.415,65.637 146.156,64.896 J3.B4_A9
  Bottom Layer w0.5: 137.922,57.785 139.065,56.642 141.589,56.642 v1(142.986,55.245) 144.452,53.779 144.452,52.653 144.011,52.211 v1(140.458,50.796) ; v1(138.557,41.275) 141.693,41.275 141.985,41.568 141.985,43.894 v1(141.314,44.565)
VDIV: R12.2 R13.2 U1.10 | length 21.2
  Top Layer w0.254: R12.2 126.402,56.185 127.725,54.862 v1(127.725,54.737) ; v1(143.698,52.965) 143.745,52.918 143.745,52.597 143.764,52.578 143.764,51.714 U1.10
  Bottom Layer w0.254: v1(127.725,54.737) 132.22,54.737 132.474,54.991 132.632,54.991 132.769,55.128 137.04,55.128 137.177,54.991 141.605,54.991 143.129,53.467 143.196,53.467 v1(143.698,52.965)
pads on no net: Designator45.7 Designator45.8 J3. J3.A8 J3.B8 U1.4 U1.5 U1.6 U1.7 U1.9 U1.11 U1.13 U1.14 U1.19 U1.21 U1.22 U1.23 U1.24 U1.25 U1.26 U1.36 U1.37 U1.38 U1.39 U1.41 U1.42 U1.43 U1.44 U1.45 U1.46 U1.48 U1.49 U1.54 U1.56 U1.57 U1.58 U1.59 U1.60 U1.61 U2.1 U2.5 U5.6 X2.C X3.P1 X3.P2

## Polygon pours and split planes (outlines as drawn)
GND on Bottom Layer "GND_L02_P025" (solid, remove dead copper, pour order 25): 113.919,38.735 cw(c113.919,40.513) 112.141,40.513 112.141,70.231 cw(c114.3,70.231) 114.3,72.39 151.892,72.39 cw(c151.892,70.231) 154.051,70.231 154.051,40.894 cw(c151.765,40.894) 151.765,38.608 113.792,38.608 cw(c113.792,38.735) 113.665,38.735
GND on Bottom Layer "NONET_L02_P008" (solid, remove dead copper, shelved, pour order 8): 114.3,70.231 116.586,72.517 150.495,72.517 153.797,69.215 153.797,38.481 151.638,36.322 116.078,36.322 114.3,38.1
GND on Bottom Layer "NONET_L02_P005" (solid, remove dead copper, shelved, pour order 5): 153.797,69.215 150.622,72.39 116.459,72.39 114.3,70.231 114.3,38.481 114.173,38.354 116.078,36.449 116.078,36.417 151.797,36.417 151.892,36.322 153.797,38.227
GND on Bottom Layer "NONET_L02_P004" (solid, remove dead copper, shelved, pour order 4): 114.3,70.231 116.459,72.39 150.622,72.39 153.797,69.215 153.797,38.227 151.892,36.322 116.078,36.322 116.078,36.512 114.236,38.354
GND on Bottom Layer "NONET_L02_P002" (solid, remove dead copper, shelved, pour order 2): 114.3,70.231 116.459,72.39 150.622,72.39 153.797,69.215 153.797,38.481 151.892,36.576 151.892,36.322 116.332,36.322 114.3,38.354 114.173,38.354
GND on Bottom Layer "NONET_L02_P000" (solid, remove dead copper, shelved, pour order 0): 129.032,38.481 129.032,70.993 129.286,70.993 131.445,73.152 131.572,73.025 176.403,73.025 176.403,72.644 177.673,71.374 177.673,40.005 177.419,40.005 174.244,36.83 174.117,36.957 130.429,36.957
GND on Top Layer "GND_L01_P024" (solid, remove dead copper, pour order 24): 112.141,70.358 cw(c114.173,70.358) 114.173,72.39 151.892,72.39 cw(c151.892,70.358) 153.924,70.358 153.924,40.894 cw(c151.765,40.894) 151.765,38.735 114.427,38.735 cw(c114.427,41.021) 112.141,41.021 112.141,70.866
GND on Top Layer "NONET_L01_P011" (solid, remove dead copper, shelved, pour order 11): 114.173,70.231 116.395,72.453 150.431,72.453 150.495,72.517 153.924,69.088 153.924,38.481 151.892,36.449 151.892,36.322 116.078,36.322 114.332,38.068 114.332,38.1
GND on Top Layer "NONET_L01_P009" (solid, remove dead copper, shelved, pour order 9): 114.3,70.104 116.459,72.263 116.459,72.517 150.495,72.517 153.924,69.088 153.924,38.481 151.765,36.322 116.11,36.322 114.332,38.1 114.3,38.1
GND on Top Layer "NONET_L01_P007" (solid, remove dead copper, shelved, pour order 7): 114.173,70.104 114.3,70.104 116.586,72.39 150.622,72.39 153.924,69.088 153.924,38.354 151.892,36.322 116.078,36.322 116.078,36.386 114.173,38.291
no net on Top Layer "NONET_L01_P006" (solid, remove dead copper, shelved, pour order 6): 114.173,70.168 116.459,72.453 116.459,72.517 150.495,72.517 153.924,69.088 153.924,38.354 151.892,36.322 116.078,36.322 114.173,38.227 114.173,38.354
no net on Top Layer "NONET_L01_P003" (solid, remove dead copper, shelved, pour order 3): 114.173,70.104 114.173,70.231 116.459,72.517 116.586,72.39 150.622,72.39 153.924,69.088 153.924,38.481 151.765,36.322 116.078,36.322 114.3,38.1
GND on Top Layer "NONET_L01_P001" (solid, remove dead copper, shelved, pour order 1): 129.11,71.026 129.319,71.026 131.318,73.025 176.149,73.025 176.149,72.898 177.673,71.374 177.673,40.132 177.546,40.132 174.371,36.957 130.556,36.957 130.556,37.211 129.159,38.608

## Silkscreen, mask and mechanical layers (free items; w line width, h text height)
Mechanical 1:
  lines w0.254: 112.173,40.735 ccw(c114.173,40.735) 114.173,38.735 ; 112.173,40.767 112.173,70.39 cw(c114.173,70.39) 114.173,72.39 151.892,72.39 cw(c151.892,70.39) 153.892,70.39 ; 114.173,38.711 151.892,38.735 ccw(c151.892,40.735) 153.892,40.735 ; 153.924,40.735 153.924,70.39

## Text inside footprints (layer, text, board x,y; h text height)
J3: Mechanical 13 "PCB EDGE" at 153.589,67.696 h0.61 r90